# EAGLE board piprojector (EAGLE 8.6.0)
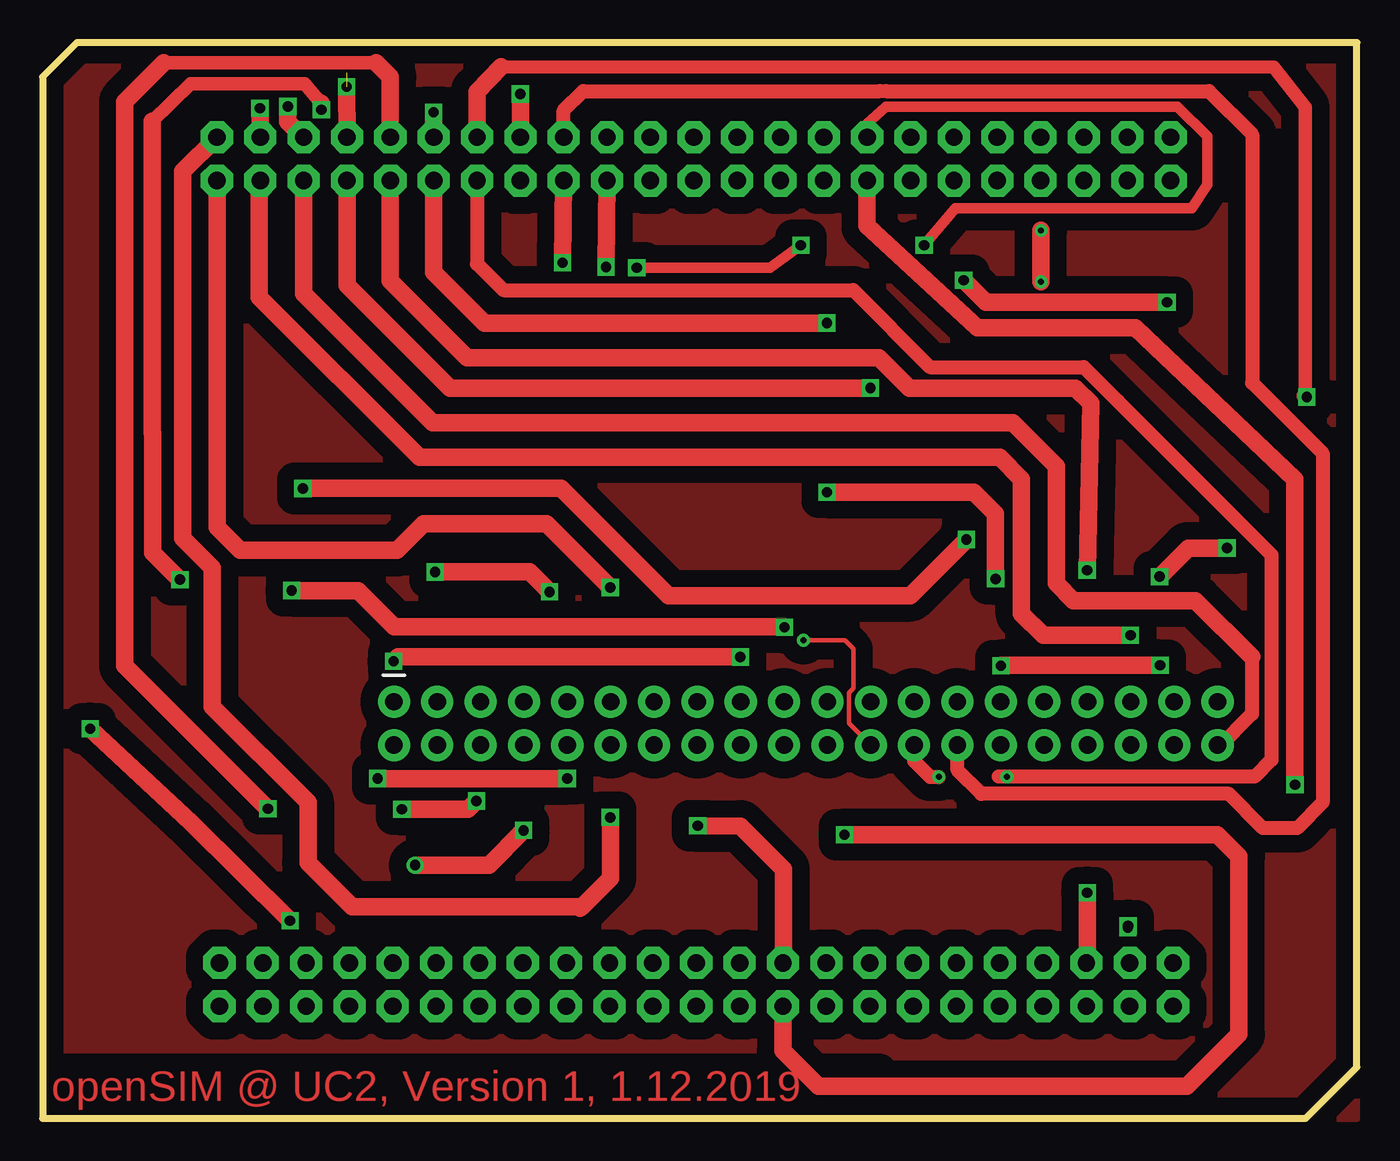
[diagram p0: board, top side]
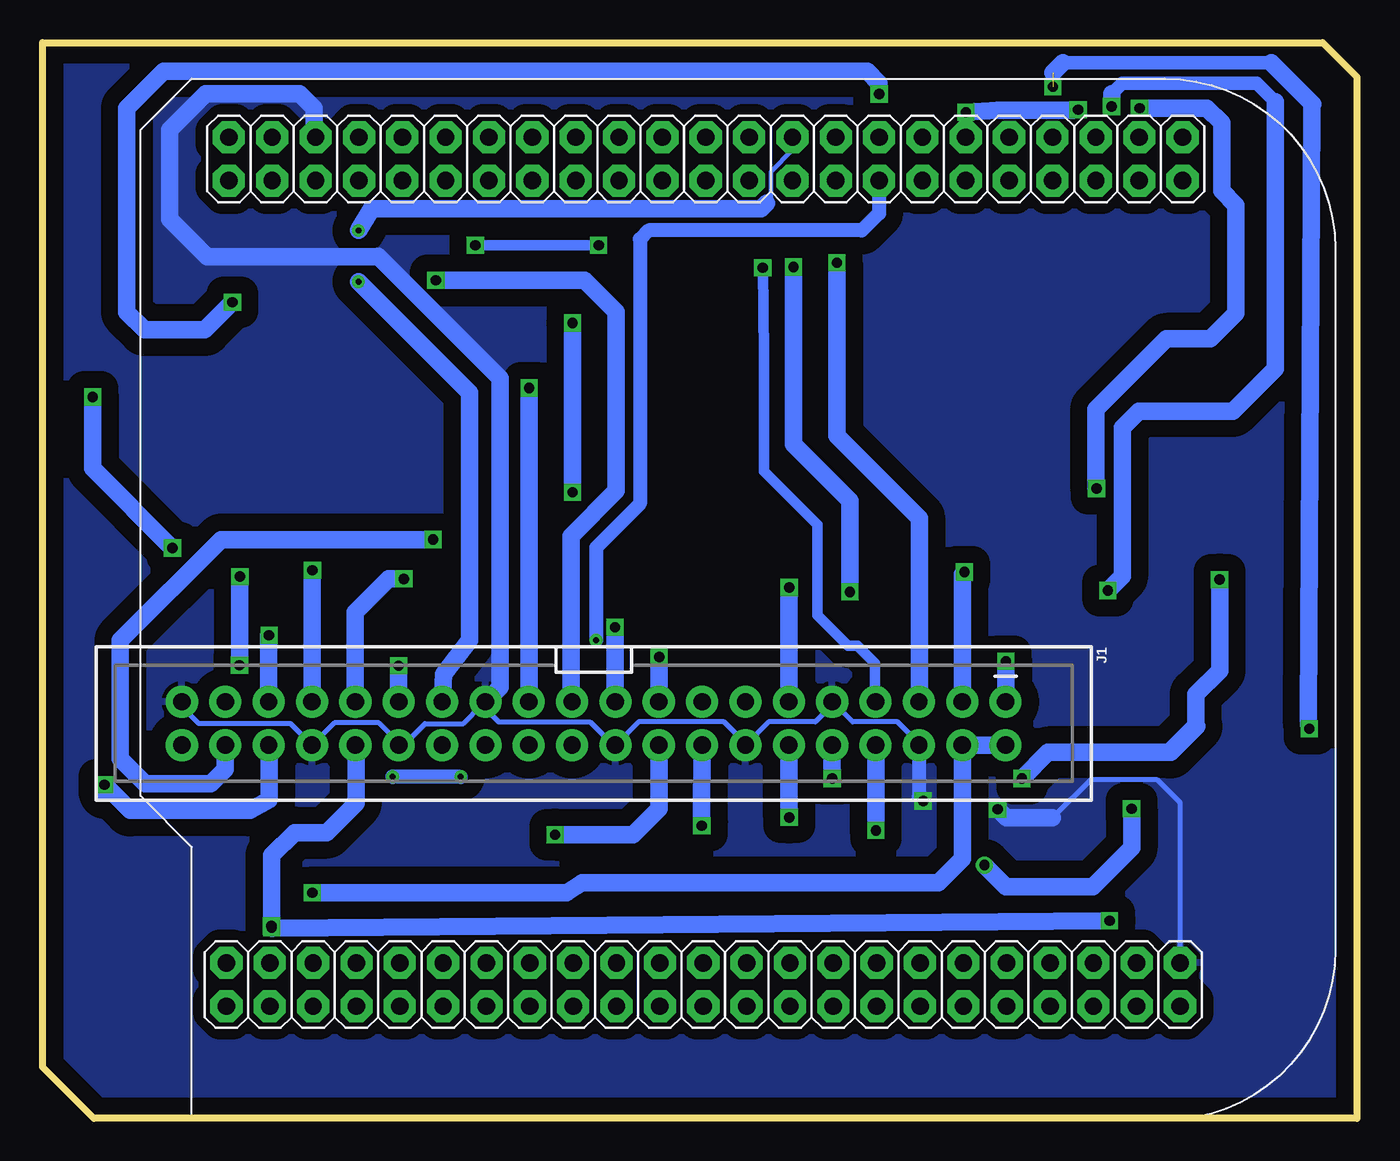
[diagram p1: board, bottom side, seen from below]

Size 77 x 63 mm. Coordinates in mm from the lower left corner, seen from the top.
Outline: 0,0 74,0 77,3 77,63 2,63 0,61 0,0
Copper layers (1*16): Top 0.035mm / dielectric 1.5mm / Bottom 0.035mm
Design rules "default": minimum track width 10mil, minimum drill 24mil, track to track 8mil, track to pad 8mil, pad to pad 8mil, via to via 8mil, smd to smd 8mil, copper to edge 40mil, drill to drill 8mil, minimum pad ring 10mil, minimum via ring 8mil, stop-mask expansion 4mil, vias tented up to drill 0mil, thermal gap 10mil

## Footprints (pad centres in the part's own frame; a part is rotated, then mirrored left to right if it is on the bottom)
2X20_SHROUDED = drill 1.016 pad 1.88: 1 -1.27,24.13; 2 1.27,24.13; 3 -1.27,21.59; 4 1.27,21.59; 5 -1.27,19.05; 6 1.27,19.05; 7 -1.27,16.51; 8 1.27,16.51; 9 -1.27,13.97; 10 1.27,13.97; 11 -1.27,11.43; 12 1.27,11.43; 13 -1.27,8.89; 14 1.27,8.89; 15 -1.27,6.35; 16 1.27,6.35; 17 -1.27,3.81; 18 1.27,3.81; 19 -1.27,1.27; 20 1.27,1.27; 21 -1.27,-1.27; 22 1.27,-1.27; 23 -1.27,-3.81; 24 1.27,-3.81; 25 -1.27,-6.35; 26 1.27,-6.35; 27 -1.27,-8.89; 28 1.27,-8.89; 29 -1.27,-11.43; 30 1.27,-11.43; 31 -1.27,-13.97; 32 1.27,-13.97; 33 -1.27,-16.51; 34 1.27,-16.51; 35 -1.27,-19.05; 36 1.27,-19.05; 37 -1.27,-21.59; 38 1.27,-21.59; 39 -1.27,-24.13; 40 1.27,-24.13
DLP2000 = drill 1.016 pad 1.88 octagon: 1 0.025,-1.325; 2 0.025,1.215; 3 2.565,-1.325; 4 2.565,1.215; 5 5.105,-1.325; 6 5.105,1.215; 7 7.645,-1.325; 8 7.645,1.215; 9 10.185,-1.325; 10 10.185,1.215; 11 12.725,-1.325; 12 12.725,1.215; 13 15.265,-1.325; 14 15.265,1.215; 15 17.805,-1.325; 16 17.805,1.215; 17 20.345,-1.325; 18 20.345,1.215; 19 22.885,-1.325; 20 22.885,1.215; 21 25.425,-1.325; 22 25.425,1.215; 23 27.965,-1.325; 24 27.965,1.215; 25 30.505,-1.325; 26 30.505,1.215; 27 33.045,-1.325; 28 33.045,1.215; 29 35.585,-1.325; 30 35.585,1.215; 31 38.125,-1.325; 32 38.125,1.215; 33 40.665,-1.325; 34 40.665,1.215; 35 43.205,-1.325; 36 43.205,1.215; 37 45.745,-1.325; 38 45.745,1.215; 39 48.285,-1.325; 40 48.285,1.215; 41 50.825,-1.325; 42 50.825,1.215; 43 53.365,-1.325; 44 53.365,1.215; 45 55.905,-1.325; 46 55.905,1.215; .1 0.17,47.03; .2 0.17,49.57; .3 2.71,47.03; .4 2.71,49.57; .5 5.25,47.03; .6 5.25,49.57; .7 7.79,47.03; .8 7.79,49.57; .9 10.33,47.03; .10 10.33,49.57; .11 12.87,47.03; .12 12.87,49.57; .13 15.41,47.03; .14 15.41,49.57; .15 17.95,47.03; .16 17.95,49.57; .17 20.49,47.03; .18 20.49,49.57; .19 23.03,47.03; .20 23.03,49.57; .21 25.57,47.03; .22 25.57,49.57; .23 28.11,47.03; .24 28.11,49.57; .25 30.65,47.03; .26 30.65,49.57; .27 33.19,47.03; .28 33.19,49.57; .29 35.73,47.03; .30 35.73,49.57; .31 38.27,47.03; .32 38.27,49.57; .33 40.81,47.03; .34 40.81,49.57; .35 43.35,47.03; .36 43.35,49.57; .37 45.89,47.03; .38 45.89,49.57; .39 48.43,47.03; .40 48.43,49.57; .41 50.97,47.03; .42 50.97,49.57; .43 53.51,47.03; .44 53.51,49.57; .45 56.05,47.03; .46 56.05,49.57

## Placement (x,y rotation side)
J1  RASPBERRYPI-40-PIN-GPIO_PTH  [2X20_SHROUDED]  44.71,23.13 270 bottom
U$1  DLP2000  [DLP2000]  66.26,7.89 0 bottom

## Library data of the parts
J1 = SparkFun-Connectors; PROD_ID: CONN-12263; SF_ID: PRT-13054
U$1 = DLP2000

## Nets
3.3V: J1.1 J1.17
DATA_0: J1.11 U$1..45
DATA_1: J1.12 U$1..46
DATA_2: J1.35 U$1..43
DATA_3: J1.38 U$1..44
DATA_4: J1.40 U$1..41
DATA_5: J1.19 U$1..42
DATA_6: J1.23 U$1..39
DATA_7: J1.32 U$1..40
DATA_8: J1.33 U$1..37
DATA_9: J1.8 U$1..38
DATA_10: J1.10 U$1..36
DATA_11: J1.29 U$1..34
DATA_12: J1.31 U$1..35
DATA_15: J1.21 U$1..32
DATA_16: J1.36 U$1..15
DATA_17: J1.7 U$1..16
GND: J1.6 J1.9 J1.14 J1.20 J1.25 J1.30 J1.34 J1.39 U$1.46 U$1..6
HSYNC: J1.5 U$1..29
N$2: J1.24 U$1..31
N$3: J1.26 U$1..33
N$4: J1.28 U$1..30
N$6: J1.27 U$1..28
SCL: J1.18 U$1.19
SDA: J1.16 U$1.20
VCC: J1.2 J1.4 U$1.6
VSYNC: J1.3 U$1..27

## Tracks (layer width: path | path; a pad name or v marks a point on that pad's centre or on a via)
3.3V  (via drill 0.6)
  Top 1.016: v40.88,27.02 20.81,27.02 v20.56,26.77
  Bottom 1.016: J1.17 40.9,27 v40.88,27.02 | v20.56,26.77 20.56,24.42 J1.1
DATA_0  (via drill 0.6)
  Top 1.016: U$1..45 10.21,34.62 11.57,33.27 20.77,33.27 22.32,34.81 29.53,34.81 v33.26,31.09
  Bottom 1.016: v33.26,31.09 33.26,24.42 J1.11
DATA_1  (via drill 0.6)
  Top 1.016: 31.48,12.29 31.58,12.39 | v33.26,17.62 33.26,14.07 31.59,12.4 31.58,12.39 | U$1..46 8.21,55.46 8.21,33.97 9.95,32.23 9.95,24.11 15.55,18.51 15.55,14.97 18.12,12.39 31.58,12.39
  Bottom 1.016: v33.26,17.62 33.26,21.84 J1.12
DATA_2  (via drill 0.6)
  Top 1.016: v63.74,28.29 58.63,28.29 57.36,29.56 57.36,37.44 56.09,38.71 22.08,38.71 12.68,48.1 12.68,54.85 U$1..43
  Bottom 1.016: J1.35 63.76,28.27 v63.74,28.29
DATA_3  (via drill 0.6)
  Top 1.016: U$1..44 12.75,59.14 v12.73,59.17 | v15.24,36.89 30.38,36.89 36.67,30.61 50.83,30.61 v54.13,33.9
  Bottom 1.016: v12.73,59.17 8.79,59.17 7.92,58.3 7.92,54.33 7.08,53.49 7.08,47.15 8.58,45.65 11.17,45.65 15.28,41.53 15.28,36.93 v15.24,36.89 | v54.13,33.9 66.54,33.9 72.45,27.99 72.45,21.07 70.99,19.61 67.14,19.61 66.3,20.45 J1.38
DATA_4  (via drill 0.6)
  Top 0.813: 70.85,27.02 70.85,23.69 v68.85,21.69
  Top 1.016: U$1..41 15.29,48.29 22.84,40.74 56.85,40.74 59.39,38.2 59.39,31.34 60.4,30.32 67.55,30.32 70.85,27.02
  Bottom 1.016: v68.85,21.69 69.01,21.69 J1.40
DATA_5  (via drill 0.6)
  Top 1.016: v14.58,30.91 18.48,30.91 20.6,28.79 43.42,28.79 v43.46,28.76 | v14.37,59.26 14.37,58.38 U$1..42
  Bottom 0.8: 4.79,59.53 5.87,60.62 13.75,60.62 14.37,60
  Bottom 1.016: v43.46,28.76 43.46,24.42 J1.19 | 4.79,59.53 4.79,43.91 7.28,41.42 12.78,41.42 13.75,40.45 13.75,31.75 v14.58,30.91 | v14.37,59.26 14.37,60
DATA_6  (via drill 0.6)
  Top 1.016: U$1..39 17.83,48.8 23.86,42.77 v48.5,42.77
  Bottom 1.016: v48.5,42.77 48.5,24.42 J1.23
DATA_7  (via drill 0.6)  (1 unrouted)
  Top 1.016: U$1..40 v17.81,60.41 | v2.79,22.82 8.7,17.32 v14.49,11.58 | v63.58,11.17 v63.6,11.28
  Bottom 0.8: 17.24,61.82 5.02,61.82
  Bottom 1.016: 17.81,61.24 17.24,61.82 | 5.02,61.82 2.58,59.38 2.63,59.2 2.83,23.4 v2.79,22.82 | v14.49,11.58 63.54,11.13 v63.58,11.17 | 58.71,21.83 J1.32 58.64,21.82 58.64,18.46 60.35,16.74 62.24,16.74 63.58,15.4 v63.6,11.28
DATA_8  (via drill 0.6)
  Top 1.016: U$1..37 20.37,49.05 24.88,44.55 49.01,44.55 50.78,42.77 58.11,42.77 60.5,42.75 61.42,41.88 v61.2,32.1
  Bottom 1.016: v61.2,32.1 61.2,24.42 J1.33
DATA_9  (via drill 0.6)
  Top 0.8: 19.54,61.82 7.1,61.82
  Top 1.016: v21.83,14.83 26.15,14.83 v28.18,16.86 | U$1..38 20.37,60.99 19.54,61.82 | 7.1,61.82 4.81,59.53 4.81,26.51 v13.19,18.13
  Bottom 1.016: v13.19,18.13 13.19,15.85 15.48,13.56 20.56,13.56 v21.83,14.83 | v28.18,16.86 28.18,21.84 J1.8
DATA_10  (via drill 0.6)
  Top 0.8: 6.43,58.4 8.66,60.58 15.36,60.58 16.33,59.46
  Top 1.016: 6.43,58.4 6.43,40.15 6.46,40.11 6.46,33.13 v8.04,31.55 | v16.33,59.07 16.33,59.46 | v19.63,19.9 v30.74,19.9 | v22.91,58.92 U$1..36
  Bottom 1.016: 9.38,22.96 10.91,21.43 11,21.43 | 11,21.43 18.09,21.43 v19.63,19.9 | 30.72,21.84 J1.10 v30.74,19.9 | 11,21.43 9.43,23 9.43,24.83 8.04,26.22 v8.04,31.55 | v16.33,59.07 16.34,59.08 16.59,59.08 16.63,59.05 21.03,59.05 v22.91,58.92
DATA_11  (via drill 0.6)
  Top 0.8: 26.87,61.6 72.15,61.55 73.99,59.21 73.99,42.32
  Top 1.016: U$1..34 25.45,60.13 26.87,61.6 | 73.99,42.32 v74.07,42.24 | v69.4,33.4 67.12,33.4 v65.44,31.73 | v65.47,26.53 56.17,26.53 v56.15,26.51
  Bottom 1.016: v74.07,42.24 74.07,38.07 v69.4,33.4 | v65.44,31.73 65.44,26.55 v65.47,26.53 | v56.15,26.51 J1.29
DATA_12  (via drill 0.6)
  Top 1.016: U$1..35 22.91,49.56 25.89,46.58 v45.96,46.58 | v45.96,36.67 54.55,36.67 55.82,35.4 55.82,31.61 v55.84,31.59
  Bottom 1.016: v45.96,46.58 v45.96,36.67 | 58.66,24.42 J1.31 58.69,29.63 56.73,31.59 v55.84,31.59
DATA_15  (via drill 0.6)
  Top 1.016: U$1..32 v27.99,60 | v65.88,47.79 55.25,47.79 v53.97,49.08
  Bottom 1.016: v27.99,60 27.99,60.63 28.67,61.32 69.91,61.32 72.06,59.17 72.06,47.22 71.02,46.18 67.49,46.18 v65.88,47.79 | v53.97,49.08 45.25,49.08 43.4,47.23 43.4,36.74 46.05,34.09 46.05,24.47 J1.21
DATA_16  (via drill 0.6)
  Top 1.016: U$1..15 48.31,52.28 54.78,46.31 64.01,46.31 73.37,37.44 v73.37,19.53
  Bottom 1.016: J1.36 63.74,21.84 63.74,18.64 64.85,18.03 71.87,18.03 v73.37,19.53 73.34,19.07
DATA_17  (via drill 0.6)
  Top 0.61: U$1..16 48.31,58.26 49.4,59.25 66.49,59.25 68.22,57.52 68.22,54.69 67.34,53.3 53.47,53.3 v51.64,51.13 | v44.42,51.13 42.61,49.82 v34.81,49.82
  Bottom 0.61: v51.64,51.13 v44.42,51.13 | v34.81,49.82 34.73,44.74 34.73,37.9 31.59,34.77 31.59,29.46 29.83,27.69 29.27,27.69 28.22,26.64 28.22,24.42 J1.7
GND  (via drill 0.6)
  Top 1.016: v21.04,18.1 24.93,18.1 v25.42,18.59
  Bottom 0.305: J1.20 42.09,23.21 37.07,23.21 35.82,21.96 J1.14 34.47,23.21 31.73,23.21 30.74,24.21 J1.9 29.55,23.21 26.91,23.21 25.66,21.96 J1.6 | 43.42,21.69 44.94,23.21 50.28,23.21 51.06,24 J1.25 51.28,24.18 52.35,23.11 54.59,23.11 55.95,21.76 J1.30 56.14,22.01 57.29,23.16 59.92,23.16 J1.34 62.49,23.13 67.86,23.13 68.84,24.11 J1.39 | U$1.46 10.36,18.49 11.7,19.83 15.59,19.83 17.83,17.59
  Bottom 0.813: J1.6 25.66,18.83 v25.42,18.59
  Bottom 1.016: 17.83,17.59 20.54,17.59 v21.04,18.1 | U$1..6 61.1,57.55 61.1,59.15 61.95,60 67.45,60 69.55,57.9 69.55,52.65 67.35,50.45 57.4,50.45 57.35,50.5 50.2,43.35 50.2,25.26 51.28,24.18
  pour Bottom (isolate 1.016): 0,0 77,0 77,63 0,63
HSYNC  (via drill 0.6)
  Top 1.016: U$1..29 v30.46,50.11
  Bottom 1.016: v30.46,50.11 30.46,39.98 25.64,35.15 25.64,24.42 J1.5
N$1
  pour Top (isolate 1.016): 0,0 77,0 77,63 0,63
N$2  (via drill 0.35)
  Top 0.254: J1.24 47.25,23.13 47.25,24.93 47.5,25.18 47.5,27.5 47,28 v44.58,28 44.5,28
  Bottom 0.813: U$1..31 28,53 29,52 41.5,52 42,51.5 42,36 44.58,33.42 v44.58,28
N$3  (via drill 0.35)
  Top 0.813: U$1..33 25.45,50.05 27,48.5 47.5,48.5 52,44 61,44 63,42 72,33 72,21 71.02,20.02 v56.5,20.02 56,20.02 | J1.26 51.06,20.94 52,20 v52.5,20
  Bottom 0.813: v56.5,20.02 56.48,20 v52.5,20
N$4
  Top 0.813: U$1..30 30.53,59.03 31.67,60.17 49.05,60.17 49.07,60.18 49.42,60.17 68.33,60.17 70.87,57.63 70.87,43.07 75,38.94 75,18.5 73.5,17 71.5,17 69.5,19 55,19 53.6,20.4 J1.28
N$6  (via drill 0.35)
  Top 1.016: v58.5,49 v58.5,52
  Bottom 0.254: 34.6,53.6 34.34,53.85 34.34,55.45 33.07,56.72 U$1..28
  Bottom 1.016: J1.27 53.5,26 52,28 52,42.5 v58.5,49 | 34.6,53.6 34.93,53.27 57.73,53.27 v58.5,52
SCL  (via drill 0.6)
  Top 1.016: U$1.19 43.38,3.95 45.45,1.88 67.04,1.88 70.09,4.92 70.09,15.34 68.82,16.61 v46.97,16.61
  Bottom 1.016: v46.97,16.61 42.4,16.61 40.88,18.13 40.88,21.84 J1.18
SDA  (via drill 0.6)
  Top 1.016: v38.38,17.13 40.88,17.12 43.42,14.58 43.42,9.15 U$1.20
  Bottom 1.016: J1.16 38.39,17.4 v38.38,17.13
VCC  (via drill 0.6)
  Top 1.016: 61.2,9.15 U$1.6 61.2,9.15 v61.2,13.21
  Bottom 1.016: J1.2 J1.4 23.12,15.2 24.52,13.8 45.41,13.8 46.31,13.2 60.71,13.2 v61.2,13.21
VSYNC  (via drill 0.6)
  Top 1.016: v23,32 28.53,32 v29.7,30.83 | U$1..27 v33,49.87
  Bottom 1.016: J1.3 23.12,31.88 v23,32 | v29.7,30.83 29.7,36.17 33,39.47 v33,49.87

## Text on the board
Top: openSIM @ UC2, Version 1, 1.12.2019